# EAGLE board minitel (EAGLE 4.09)
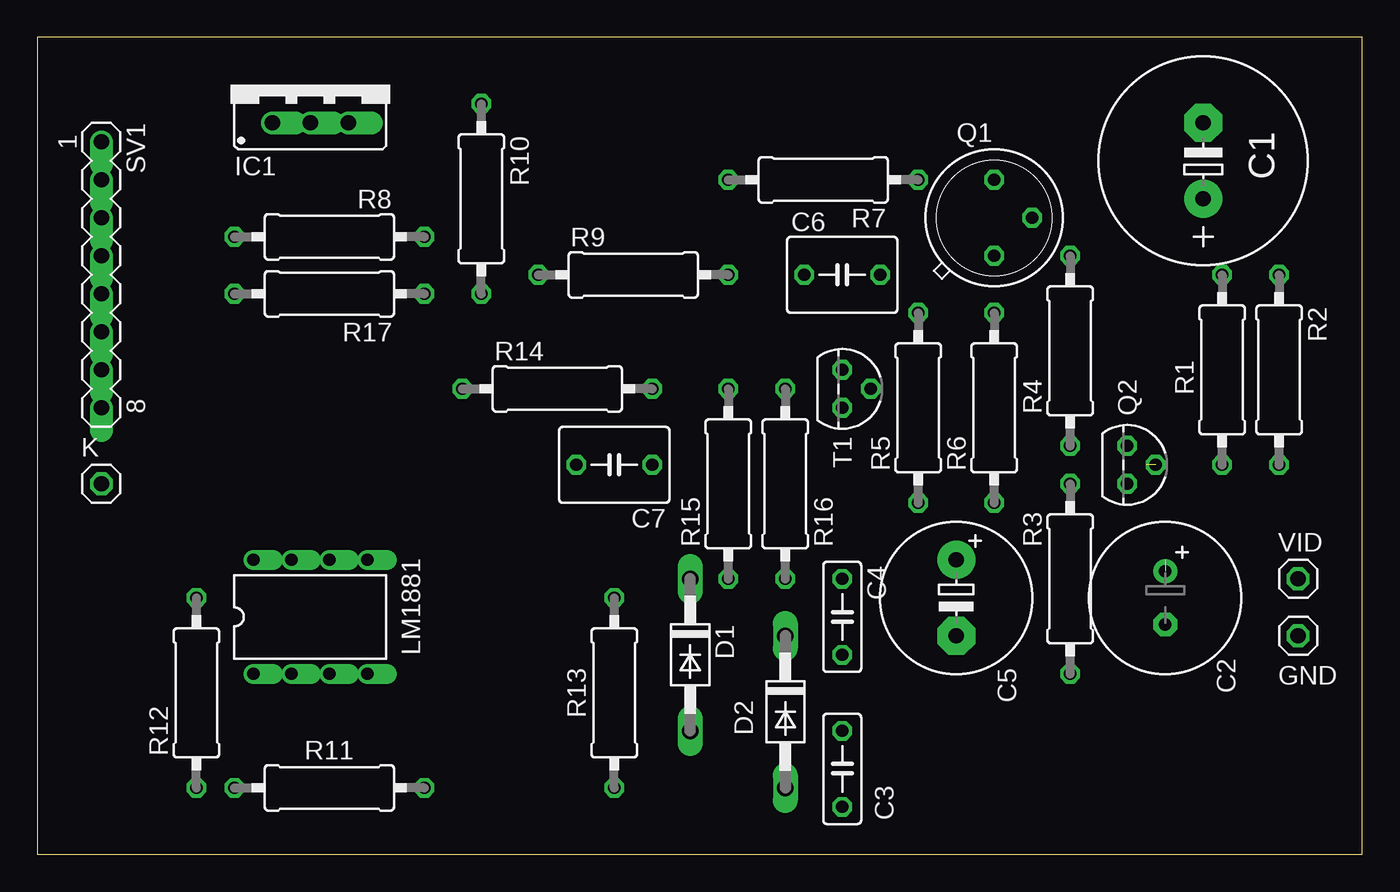
[diagram p0: board, top side]
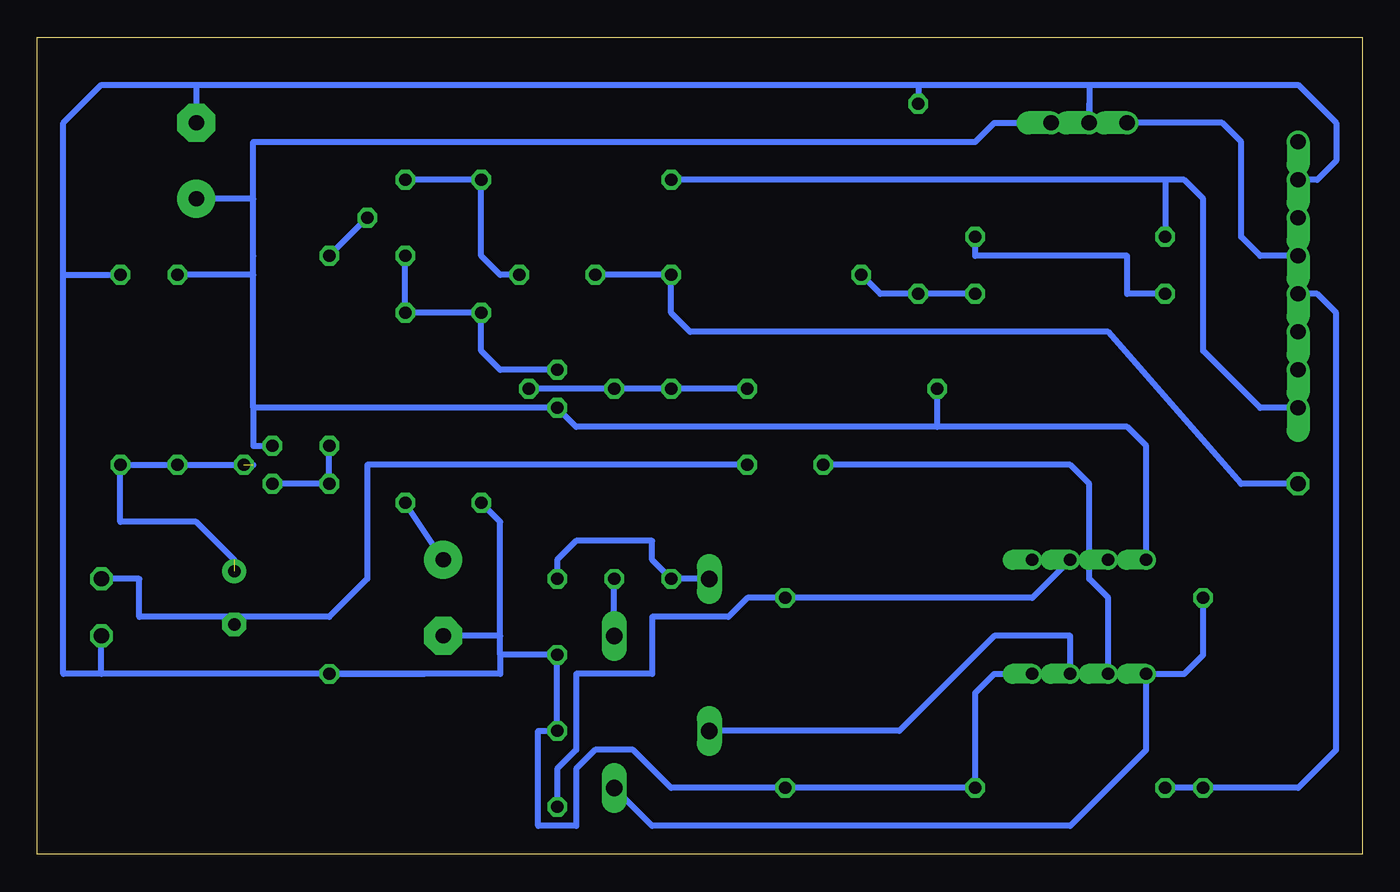
[diagram p1: board, bottom side, seen from below]

Size 88.57 x 54.6 mm. Coordinates in mm from the lower left corner, seen from the top.
Outline: 0,0 88.57,0 88.57,54.6 0,54.6 0,0
Copper layers used: Bottom

## Footprints (pad centres in the part's own frame; a part is rotated, then mirrored left to right if it is on the bottom)
E5-13 = drill 1.016 pad 2.54 round: + -2.54,0 | drill 1.016 pad 2.54 octagon: - 2.54,0
E3,5-10 = drill 0.813 pad 1.6 round: + -1.778,0 | drill 0.813 pad 1.6 octagon: - 1.778,0
C050-025X075 = drill 0.813 octagon: 1 -2.54,0; 2 2.54,0
E5-10,5 = drill 1.016 pad 2.54 round: + -2.54,0 | drill 1.016 pad 2.54 octagon: - 2.54,0
C050-050X075 = drill 0.813 octagon: 1 -2.54,0; 2 2.54,0
DO41-10 = drill 1.118 long: A 5.08,0; C -5.08,0
1X01 = drill 1.016 octagon: 1 0,0
78XXS = drill 1.016 offset: GND 0,-2.54; IN -2.54,-2.54; OUT 2.54,-2.54
DIL08 = drill 0.813 offset: 1 -3.81,-3.81; 2 -1.27,-3.81; 3 1.27,-3.81; 4 3.81,-3.81; 5 3.81,3.81; 6 1.27,3.81; 7 -1.27,3.81; 8 -3.81,3.81
TO39 = drill 0.813 octagon: 1 0,-2.54; 2 2.54,0; 3 0,2.54
TO92 = drill 0.813 octagon: 1 1.27,0; 2 0,1.905; 3 -1.27,0
0309/12 = drill 0.813 octagon: 1 -6.35,0; 2 6.35,0
MA08-1 = drill 1.016 offset: 1 -8.89,0; 2 -6.35,0; 3 -3.81,0; 4 -1.27,0; 5 1.27,0; 6 3.81,0; 7 6.35,0; 8 8.89,0

## Placement (x,y rotation side)
C1  470uF  [E5-13]  77.94,46.35 90 top
C2  47uF  [E3,5-10]  75.4,17.14 270 top
C3  100nF  [C050-025X075]  53.81,5.71 90 top
C4  22nF  [C050-025X075]  53.81,15.87 270 top
C5  100uF  [E5-10,5]  61.43,17.14 270 top
C6  220nF  [C050-050X075]  53.81,38.73 0 top
C7  100nF  [C050-050X075]  38.57,26.03 180 top
D1  1N4004  [DO41-10]  43.65,13.33 270 top
D2  1N4004  [DO41-10]  50,9.52 270 top
GND  [1X01]  84.29,14.6 0 top
IC1  [78XXS]  18.25,51.43 0 top
K  [1X01]  4.28,24.76 0 top
LM1881  [DIL08]  18.25,15.87 0 top
Q1  2N1711  [TO39]  63.97,42.54 0 top
Q2  BC547  [TO92]  72.86,26.03 270 top
R1  10K  [0309/12]  79.21,32.38 90 top
R2  10K  [0309/12]  83.02,32.38 270 top
R3  470  [0309/12]  69.05,18.41 90 top
R4  180  [0309/12]  69.05,33.65 90 top
R5  680  [0309/12]  58.89,29.84 90 top
R6  330  [0309/12]  63.97,29.84 90 top
R7  4.7K  [0309/12]  52.54,45.08 180 top
R8  47K  [0309/12]  19.52,41.27 180 top
R9  330K  [0309/12]  39.84,38.73 0 top
R10  22K  [0309/12]  29.68,43.81 270 top
R11  1K  [0309/12]  19.52,4.44 180 top
R12  1K  [0309/12]  10.63,10.79 90 top
R13  680K  [0309/12]  38.57,10.79 90 top
R14  10K  [0309/12]  34.76,31.11 0 top
R15  22K  [0309/12]  46.19,24.76 90 top
R16  33K  [0309/12]  50,24.76 90 top
R17  3.3K  [0309/12]  19.52,37.46 180 top
SV1  [MA08-1]  4.28,38.73 270 top
T1  BC557  [TO92]  53.81,31.11 270 top
VID  [1X01]  84.29,18.41 0 top

## Library data of the parts
C1-C7 R1-R17 = rcl
D1 D2 = diode
GND K VID = pinhead
IC1 = v-reg
LM1881 = dil
Q1 Q2 = transistor-npn
SV1 = con-lstb
T1 = transistor-pnp

## Nets
N$1: R8.1 R17.2
N$2: C2.+ Q2.2 R1.1 R2.2
N$3: Q2.1 R3.2 R4.1
N$4: Q1.1 R5.2 R6.2 T1.3
N$5: R11.2 R12.1 SV1.5
N$6: C6.2 Q1.3 R7.1
N$7: Q1.2 R4.2
N$8: R14.2 R15.2 R16.2 T1.2
N$11: C6.1 K.1 R9.2
N$12: R9.1 R10.2 R17.1
N$13: C5.+ R6.1
N$14: C4.1 D1.C R15.1
N$15: D2.C R16.1
N$16: D2.A LM1881.1 R12.2
N$19: C1.+ IC1.OUT LM1881.8 Q2.3 R1.2 R14.1 T1.1
N$20: C1.- C3.2 C4.2 C5.- GND.1 IC1.GND LM1881.4 R2.1 R3.1 R5.1 R10.1 R11.1 R13.1 SV1.2
N$21: C3.1 LM1881.6 R13.2
N$23: C7.2 LM1881.2
N$24: C2.- C7.1
N$25: D1.A LM1881.3
N$26: IC1.IN SV1.4
N$28: R7.2 R8.2 SV1.8

## Tracks (layer width: path | path; a pad name or v marks a point on that pad's centre or on a via)
N$1
  Bottom 0.406: R8.1 25.87,40 15.71,40 15.71,37.46 R17.2
N$2  (2 unrouted)
  Bottom 0.406: 74.13,26.03 R1.1 R2.2 83.02,22.22 77.94,22.22 75.4,19.68
N$3
  Bottom 0.406: Q2.1 R3.2 R4.1
N$4
  Bottom 0.406: Q1.1 R6.2 R5.2 58.89,33.65 57.62,32.38 T1.3
N$5
  Bottom 0.406: SV1.5 3.01,37.46 1.74,36.19 1.74,6.98 4.28,4.44 R12.1 R11.2
N$6
  Bottom 0.406: C6.2 57.62,38.73 58.89,40 R7.1 Q1.3
N$7
  Bottom 0.406: Q1.2 R4.2
N$8
  Bottom 0.406: T1.2 R16.2 R15.2 R14.2
N$11
  Bottom 0.406: C6.1 R9.2 46.19,36.19 44.92,34.92 16.98,34.92 8.09,24.76 K.1
N$12
  Bottom 0.406: R9.1 32.22,37.46 R10.2 R17.1
N$13
  Bottom 0.406: C5.+ R6.1
N$14
  Bottom 0.406: C4.1 53.81,19.68 52.54,20.95 47.46,20.95 47.46,19.68 R15.1 D1.C
N$15
  Bottom 0.406: D2.C R16.1
N$16
  Bottom 0.406: R12.2 10.63,13.33 11.9,12.06 LM1881.1 14.44,6.98 19.52,1.9 47.46,1.9 D2.A
N$19
  Bottom 0.406: IC1.OUT 24.6,48.89 25.87,47.62 74.13,47.62 74.13,43.81 | 28.41,28.57 52.54,28.57 T1.1 74.13,29.84 | 28.41,28.57 R14.1 | LM1881.8 14.44,27.3 15.71,28.57 28.41,28.57 | 74.13,43.81 C1.+ | 74.13,43.81 74.13,40 74.13,38.73 | 74.13,38.73 R1.2 | Q2.3 74.13,27.3 74.13,29.84 | 74.13,29.84 74.13,38.73
N$20
  Bottom 0.406: SV1.2 3.01,45.08 1.74,46.35 1.74,48.89 4.28,51.43 19.52,51.43 | 18.25,50.16 IC1.GND 18.25,51.43 19.52,51.43 | 29.68,51.43 19.52,51.43 | 77.94,51.43 29.68,51.43 | 77.94,51.43 84.29,51.43 86.83,48.89 86.83,38.73 | 77.94,51.43 C1.- | 86.83,38.73 R2.1 | 86.83,38.73 86.83,12.06 84.29,12.06 | R3.1 84.29,12.06 | R3.1 62.7,12.06 | R5.1 57.62,22.22 57.62,14.6 | 29.68,51.43 R10.1 | C3.2 C4.2 | R11.1 R13.1 | LM1881.4 24.6,12.06 25.87,10.79 R11.1 | R11.1 R13.1 | R13.1 46.19,4.44 48.73,6.98 51.27,6.98 52.54,5.71 52.54,1.9 55.08,1.9 55.08,8.25 C3.2 | 57.62,14.6 C5.- | R3.1 57.62,12.06 57.62,13.33 | 57.62,13.33 57.62,14.6 | C3.2 C4.2 | C4.2 57.62,13.33 | 84.29,12.06 GND.1
N$21
  Bottom 0.406: LM1881.6 22.06,17.14 R13.2 41.11,17.14 42.38,15.87 47.46,15.87 47.46,12.06 52.54,12.06 52.54,6.98 53.81,5.71 C3.1
N$23
  Bottom 0.406: C7.2 19.52,26.03 18.25,24.76 18.25,18.41 16.98,17.14 LM1881.2
N$24
  Bottom 0.406: C7.1 66.51,26.03 66.51,18.41 69.05,15.87 75.4,15.87 | 75.4,15.87 C2.- | 75.4,15.87 81.75,15.87 81.75,18.41 84.29,18.41
N$25
  Bottom 0.406: D1.A 30.95,8.25 24.6,14.6 19.52,14.6 LM1881.3
N$26
  Bottom 0.406: SV1.4 6.82,40 8.09,41.27 8.09,47.62 9.36,48.89 IC1.IN
N$28
  Bottom 0.406: SV1.8 6.82,29.84 10.63,33.65 10.63,43.81 11.9,45.08 13.17,45.08 | 13.17,45.08 R7.2 | 13.17,45.08 R8.2